# Allegro board SOLAR_v1.brd
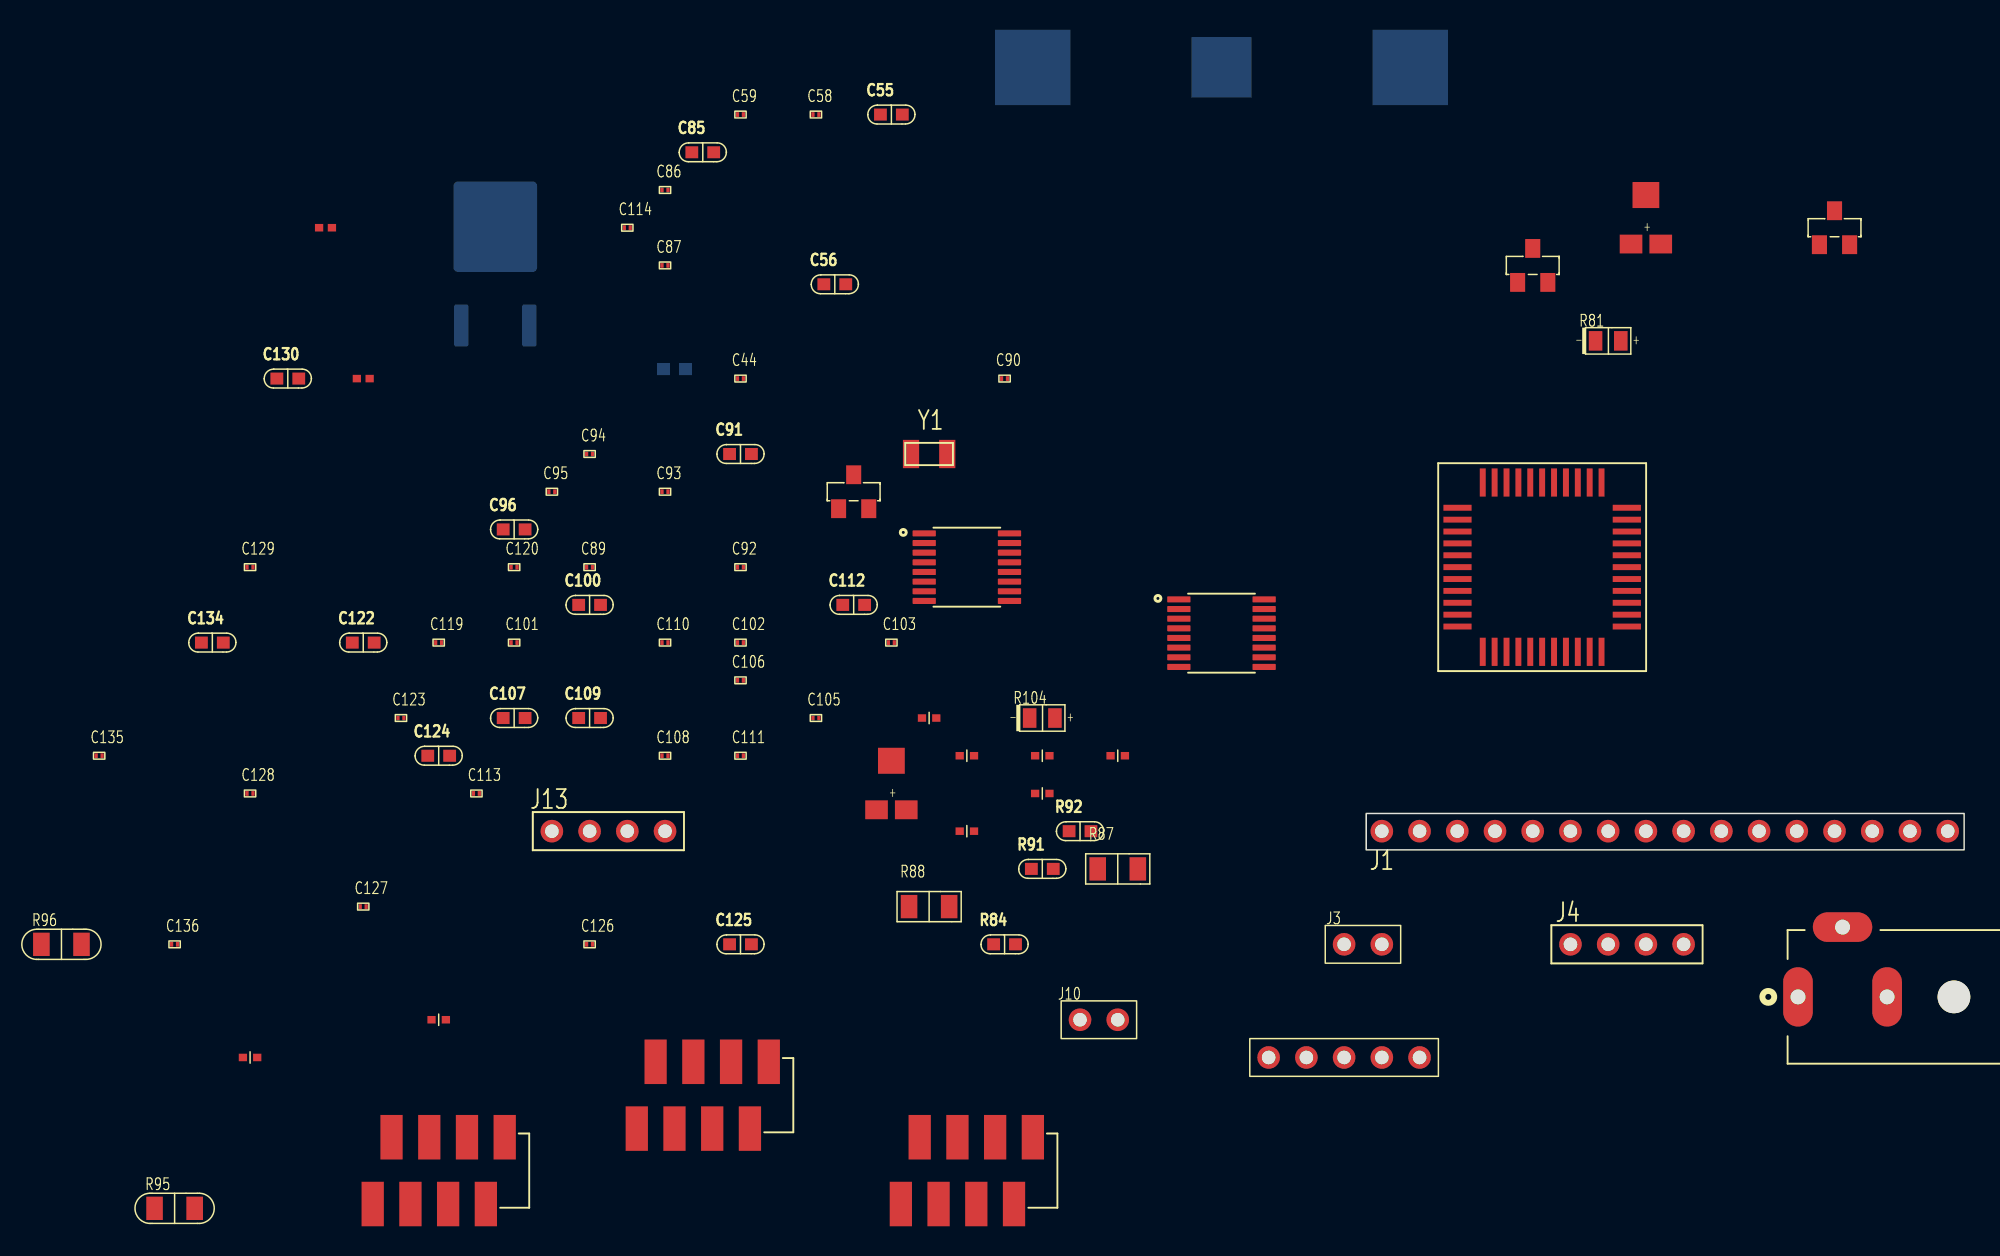
[diagram p0: board, top side]
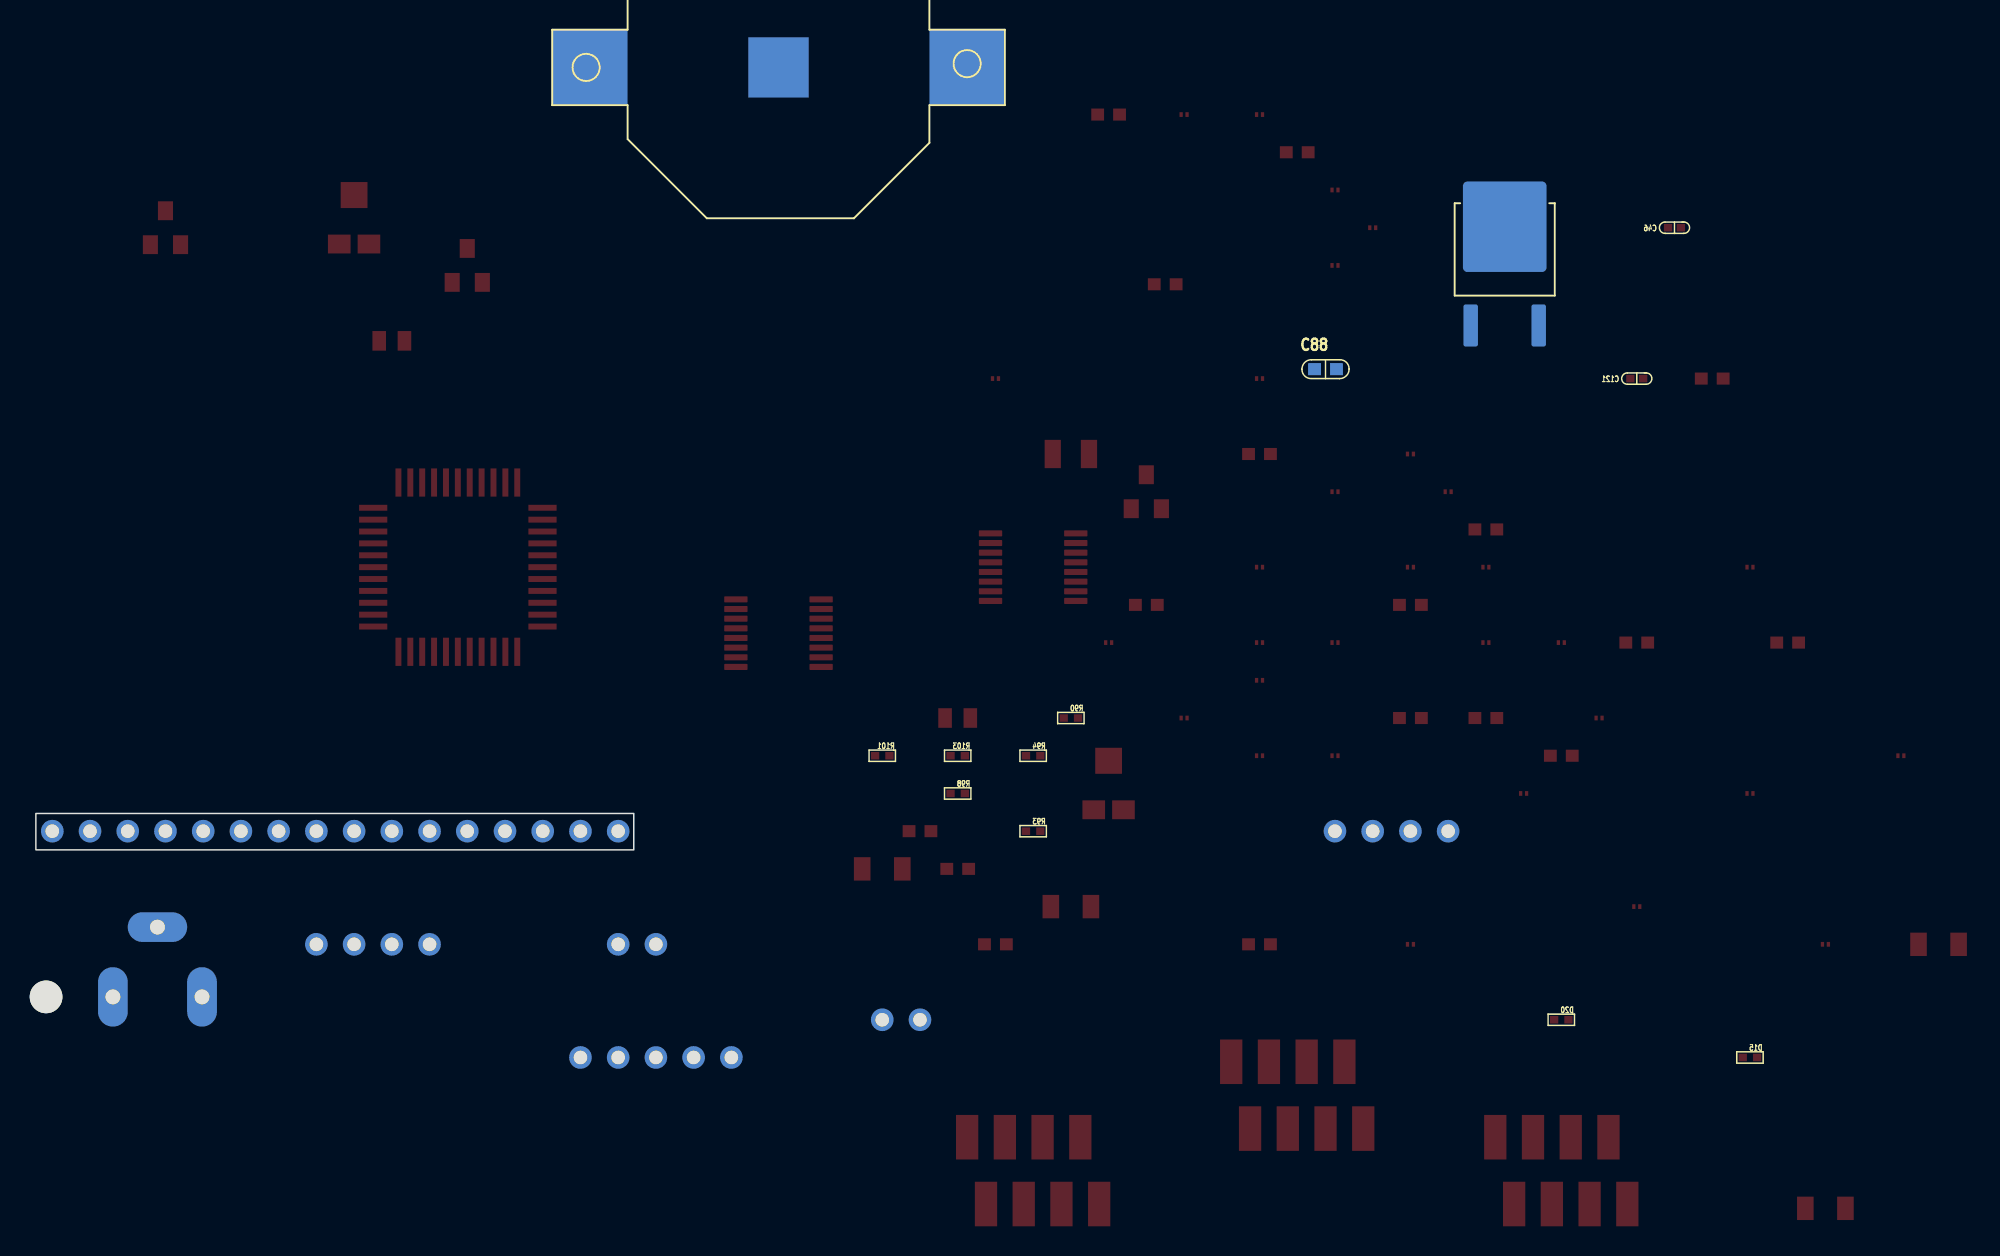
[diagram p1: board, bottom side, seen from below]

Outline 40.25 x 2.45 mm; copper layers: TOP, BOTTOM. Coordinates in mm from the lower left corner of the outline.

## Design rules (mm)
constraint set DEFAULT: min track width 0.127

## Placement (name value [footprint] x y rotation side)
C44  0.1u  [0201]  -42.13 31.74 0 top
C46  0.22u  [0402C_B]  -70.07 41.9 0 top
C55  10u  [0603G_B]  -31.97 49.52 0 top
C56  4.7u  [0603G_B]  -35.78 38.09 0 top
C58  1u  [0201]  -37.05 49.52 0 top
C59  0.1u  [0201]  -42.13 49.52 0 top
C85  10u  [0603G_B]  -44.67 46.98 0 top
C86  1u  [0201]  -47.21 44.44 0 top
C87  0.1u  [0201]  -47.21 39.36 0 top
C88  10u  [0603G_B]  -46.57 32.37 180 bottom
C89  1u  [0201]  -52.29 19.04 0 top
C90  0.1u  [0201]  -24.35 31.74 0 top
C91  10u  [0603G_B]  -42.13 26.66 0 top
C92  1u  [0201]  -42.13 19.04 0 top
C93  0.1u  [0201]  -47.21 24.12 0 top
C94  1u  [0201]  -52.29 26.66 0 top
C95  0.1u  [0201]  -54.83 24.12 0 top
C96  10u  [0603G_B]  -57.37 21.58 0 top
C100  10u  [0603G_B]  -52.29 16.5 0 top
C101  1u  [0201]  -57.37 13.96 0 top
C102  0.1u  [0201]  -42.13 13.96 0 top
C103  0.1u  [0201]  -31.97 13.96 0 top
C105  1u  [0201]  -37.05 8.88 0 top
C106  0.1u  [0201]  -42.13 11.42 0 top
C107  10u  [0603G_B]  -57.37 8.88 0 top
C108  0.1u  [0201]  -47.21 6.34 0 top
C109  10u  [0603G_B]  -52.29 8.88 0 top
C110  1u  [0201]  -47.21 13.96 0 top
C111  0.1u  [0201]  -42.13 6.34 0 top
C112  10u  [0603G_B]  -34.51 16.5 0 top
C113  1u  [0201]  -59.91 3.8 0 top
C114  0.1u  [0201]  -49.75 41.9 0 top
C119  0.1u  [0201]  -62.45 13.96 0 top
C120  0.1u  [0201]  -57.37 19.04 0 top
C121  0.22u  [0402C_B]  -67.53 31.74 0 top
C122  10u  [0603G_B]  -67.53 13.96 0 top
C123  1u  [0201]  -64.99 8.88 0 top
C124  10u  [0603G_B]  -62.45 6.34 0 top
C125  10u  [0603G_B]  -42.13 -6.36 0 top
C126  1u  [0201]  -52.29 -6.36 0 top
C127  0.1u  [0201]  -67.53 -3.82 0 top
C128  1u  [0201]  -75.15 3.8 0 top
C129  0.1u  [0201]  -75.15 19.04 0 top
C130  10u  [0603G_B]  -72.61 31.74 0 top
C134  10u  [0603G_B]  -77.69 13.96 0 top
C135  1u  [0201]  -85.31 6.34 0 top
C136  0.1u  [0201]  -80.23 -6.36 0 top
D15  CDBQC0130L-HF  [0402R_B]  -75.15 -13.98 0 top
D20  CDBQC0130L-HF  [0402R_B]  -62.45 -11.44 0 top
H1  Coin Cell Bat Holder  [CR2032-SMD]  -9.74 52.69 180 bottom
J1  LCD Conn  [JUMPER16X1]  1.05 1.26 0 top
J2  KEYPAD CONN  [HEADER_8_SMT_254MM]  -44.67 -16.52 0 top
J3  MagSensor CONN  [JUMPER2]  -1.49 -6.36 0 top
J4  STEPPER MOTOR CONN  [JUMPER4]  13.75 -6.36 0 top
J6  CON2  [DC_JACK]  34.07 -8.9 0 top
J8  HEADER 8  [HEADER_8_SMT_254MM]  -26.89 -21.6 0 top
J9  HEADER 5  [JUMPER5]  -6.57 -13.98 0 top
J10  Fan Conn  [JUMPER2]  -19.27 -11.44 0 top
J12  HEADER 8  [HEADER_8_SMT_254MM]  -62.45 -21.6 0 top
J13  HEADER 4  [JUMPER4]  -54.83 1.26 0 top
Q1  MOSFET N  [SOT23-3A]  -34.51 24.12 0 top
Q4  MOSFET P  [SOT23-3A]  11.21 39.36 0 top
Q5  MOSFET N  [SOT23-3A]  31.53 41.9 0 top
R80  858-35WR1KLFTR  [VARR]  18.83 41.9 0 top
R81  2.1K  [0805D]  16.29 34.28 0 top
R84  0  [0603G_B]  -24.35 -6.36 0 top
R87  50mOhm  [1206R]  -16.73 -1.28 0 top
R88  50mOhm  [1206R]  -29.43 -3.82 0 top
R89  858-35WR20KLFTR  [VARR]  -31.97 3.8 0 top
R90  0  [0402R_B]  -29.43 8.88 0 top
R91  0  [0603G_B]  -21.81 -1.28 0 top
R92  0  [0603G_B]  -19.27 1.26 0 top
R93  10k  [0402R_B]  -26.89 1.26 0 top
R94  20k  [0402R_B]  -26.89 6.34 0 top
R95  100k  [1206C]  -80.23 -24.14 0 top
R96  100k  [1206C]  -87.85 -6.36 0 top
R98  10k  [0402R_B]  -21.81 3.8 0 top
R101  0  [0402R_B]  -16.73 6.34 0 top
R103  10k  [0402R_B]  -21.81 6.34 0 top
R104  100ohm  [0805D]  -21.81 8.88 0 top
U19  STC15_LQFP44  [LQFP-44]  11.85 19.04 0 top
U20  NCP5501UG  [DPAK229P990X238-3N]  -58.64 37.45 180 bottom
U23  SN74LV4051A-Q1  [SOP65P640X120-16N]  -26.89 19.04 0 top
U24  SN74LV4051A-Q1  [SOP65P640X120-16N]  -9.74 14.59 0 top
Y1  32.768kHz  [XTAL320X150X90]  -29.43 26.66 0 top

## Library data of the parts
C44 = CAP NP
C46 C121 = CAPACITOR
C55 C56 C58 C59 C85-C96 C100-C103 C105-C114 C119 C120 C122-C130 C134-C136 = CAP
D15 D20 = DIODE
H1 = Coin Cell Bat Holder
J1 = HEADER 16
J2 J8 J12 = HEADER 8
J3 = HEADER 2
J4 J13 = HEADER 4
J6 = CON2_1
J9 = HEADER 5
J10 = CON2
Q1 Q5 = MOSFET N_1
Q4 = MOSFET P_1
R80 R89 = RESISTOR VAR
R81 R104 = RESISTOR
R84 R87 R88 R90-R96 R98 R101 R103 = R
U19 = STC15
U20 = NCP5501UG
U23 U24 = SN74LV4051A-Q1
Y1 = CRYSTAL

## Footprints (pads in the part's own frame, mm; a bottom-side part is the same pattern mirrored in y, then rotated)
0201
  rect 0.22x0.32 smd: 1(-0.203,0) 2(0.197,0)
0402C_B
  rect 0.559x0.508 smd: 1(-0.432,0) 2(0.432,0)
0402R_B
  rect 0.559x0.508 smd: 1(-0.483,0) 2(0.483,0)
0603G_B
  rect 0.864x0.813 smd: 1(-0.737,0) 2(0.737,0)
0805D
  rect 0.914x1.321 smd: 1(0.85,0) 2(-0.85,0)
1206C
  rect 1.118x1.575 smd: 1(-1.35,0) 2(1.35,0)
1206R
  rect 1.118x1.575 smd: 1(-1.35,0) 2(1.35,0)
CR2032-SMD
  rect 5.08x5.08 smd: 1(-12.7,0) 2(12.7,0)
  rect 4.064x4.064 smd: 3(0,0)
DC_JACK
  round 2.2 hole 2.2 unplated: (5.5,-1)
  oval 2x4 hole 1: 1(-5,-1) 2(1,-1)
  oval 4x2 hole 1: 3(-2,3.7)
DPAK229P990X238-3N
  custom 0.97x2.83 smd: 1(-2.29,-2.14) 3(2.29,-2.14)
  custom 5.63x6.09 smd: 4(0,4.51)
HEADER_8_SMT_254MM
  rect 1.5x3 smd: 1(-4.445,-2.25) 2(-3.175,2.25) 3(-1.905,-2.25) 4(-0.635,2.25) 5(0.635,-2.25) 6(1.905,2.25) 7(3.175,-2.25) 8(4.445,2.25)
JUMPER2
  round 1.524 hole 0.914: 1(0,0) 2(2.54,0)
JUMPER4
  round 1.524 hole 0.914: 1(0,0) 2(2.54,0) 3(5.08,0) 4(7.62,0)
JUMPER5
  round 1.524 hole 0.914: 1(0,0) 2(2.54,0) 3(5.08,0) 4(7.62,0) 5(10.16,0)
JUMPER16X1
  round 1.524 hole 0.914: 1(0,0) 2(2.54,0) 3(5.08,0) 4(7.62,0) 5(10.16,0) 6(12.7,0) 7(15.24,0) 8(17.78,0) 9(20.32,0) 10(22.86,0) 11(25.4,0) 12(27.94,0) 13(30.48,0) 14(33.02,0) 15(35.56,0) 16(38.1,0)
LQFP-44
  rect 1.9x0.4 smd: 1(-5.7,4) 2(-5.7,3.2) 3(-5.7,2.4) 4(-5.7,1.6) 5(-5.7,0.8) 6(-5.7,0) 7(-5.7,-0.8) 8(-5.7,-1.6) 9(-5.7,-2.4) 10(-5.7,-3.2) 11(-5.7,-4) 23(5.7,-4) 24(5.7,-3.2) 25(5.7,-2.4) 26(5.7,-1.6) 27(5.7,-0.8) 28(5.7,0) 29(5.7,0.8) 30(5.7,1.6) 31(5.7,2.4) 32(5.7,3.2) 33(5.7,4)
  rect 0.4x1.9 smd: 12(-4,-5.7) 13(-3.2,-5.7) 14(-2.4,-5.7) 15(-1.6,-5.7) 16(-0.8,-5.7) 17(0,-5.7) 18(0.8,-5.7) 19(1.6,-5.7) 20(2.4,-5.7) 21(3.2,-5.7) 22(4,-5.7) 34(4,5.7) 35(3.2,5.7) 36(2.4,5.7) 37(1.6,5.7) 38(0.8,5.7) 39(0,5.7) 40(-0.8,5.7) 41(-1.6,5.7) 42(-2.4,5.7) 43(-3.2,5.7) 44(-4,5.7)
SOP65P640X120-16N
  custom 1.57x0.41 smd: 1(-2.87,2.275) 2(-2.87,1.625) 3(-2.87,0.975) 4(-2.87,0.325) 5(-2.87,-0.325) 6(-2.87,-0.975) 7(-2.87,-1.625) 8(-2.87,-2.275) 9(2.87,-2.275) 10(2.87,-1.625) 11(2.87,-0.975) 12(2.87,-0.325) 13(2.87,0.325) 14(2.87,0.975) 15(2.87,1.625) 16(2.87,2.275)
SOT23-3A
  rect 1.016x1.27 smd: 1(-1.016,-1.143) 2(1.016,-1.143) 3(0,1.143)
VARR
  rect 1.524x1.27 smd: 1(-1,-1.1) 2(1,-1.1)
  rect 1.803x1.753 smd: 3(0,2.2)
XTAL320X150X90
  rect 1.092x1.905 smd: 1(-1.219,0) 2(1.219,0)

## Nets
GND: C44.2 C124.2 C125.2 C126.2 C127.2 C134.2 C135.2 C136.2 H1.3 J1.3 R101.1
VBAT: H1.1 H1.2(P1) Q4.2(SOURCE)
VBAT_MOSFET_D: D20.1 Q4.3
VCC: C44.1 C56.1 C85.1 C86.1 C87.1 C88.1 C89.1 C90.1 C91.1 C92.1 C93.1 C94.1 C95.1 C96.1 C100.1 C101.1 C102.1 C103.1 C105.1 C106.1 C109.1 C110.1 C111.1 C112.1 C113.1 C114.1 C121.1 C128.1 C129.1 C130.1 D15.1 J1.4 J3.1 J13.4 Q4.1 R80.3 R90.2 R94.1 R95.2 R98.1 U19.14 U23.16 U24.16
VDD_RTC: C134.1 C135.1 C136.1 D15.2(CATHODE) D20.2(CATHODE)
0: C46.2 C55.2 C56.2 C58.2 C59.2 C85.2 C86.2 C87.2 C88.2 C89.2 C90.2 C91.2 C92.2 C93.2 C94.2 C95.2 C96.2 C100.2 C101.2 C102.2 C103.2 C105.2 C106.2 C107.2 C108.2 C109.2 C110.2 C111.2 C112.2 C113.2 C114.2 C121.2 C122.2 C123.2 C128.2 C129.2 C130.2 J6.1 J6.2 J13.3 Q1.2(SOURCE) R80.1 R81.2 R84.2 R87.1 R88.1 R89.1 R91.2 R92.2 R93.2 R96.2 R103.1 R104.2 U19.16 U20.4 U23.6 U23.7 U23.8 U24.6 U24.7 U24.8
A4988_ENABLE: R96.1
A4988_REF: Q5.3 R89.2(WIPER)
ADC0: U19.4 U24.3
ADC0_A: U19.34 U24.11
ADC0_B: U19.35 U24.10
ADC0_C: U19.36 U24.9
ADC0_I0: J8.1 U24.13
ADC0_I1: J8.2 U24.14
ADC0_I2: J8.3 U24.15
ADC0_I3: J8.4 U24.12
ADC0_I4: J8.5 U24.1
ADC0_I5: J8.6 U24.5
ADC0_I6: J8.7 U24.2
ADC0_I7: J8.8 U24.4(Y7)
ADC0_I8: J12.1 U23.13
ADC0_I9: J12.2 U23.14
ADC0_I10: J12.3 U23.15
ADC0_I11: J12.4 U23.12
ADC0_I12: J12.5 U23.1
ADC0_I13: J12.6 U23.5
ADC0_I14: J12.7 U23.2
ADC0_I15: J12.8 U23.4(Y7)
ADC1: U19.5 U23.3
ADC1_A: U19.37 U23.11
ADC1_B: U19.38 U23.10
ADC1_C: U19.39 U23.9
ADC2: J9.1 U19.7
ADC3: J9.2 U19.8
ADC4: J9.3 U19.9
ADC5: J9.4 U19.10
ADC6: J9.5 U19.11(XTAL2/RXD_3/ADC6/P1.6)
CP1: C120.1
CP2: C120.2
FAN+V: J10.2 Q1.3
KP1: J2.1 U19.40
KP2: J2.2 U19.41
KP3: J2.3 U19.42
KP4: J2.4 U19.43
KP5: J2.5 U19.44
KP6: J2.6 U19.1
KP7: J2.7 U19.2
KP8: J2.8 U19.3
LCD_CONTRAST: J1.5 R80.2(WIPER)
LCD_D5: J1.13 U19.22
LCD_D6: J1.14 U19.23
LCD_D7: J1.15 U19.24
LCD_D8: J1.16 U19.25
LCD_EN: J1.8 U19.21
LCD_RS: J1.6 U19.17
LCD_RW: J1.7 U19.20
MS1: R84.1
MS2: R91.1
MS3: R92.1
MTOR_CURRENT_CTRL: Q5.1 U19.13
OUT1A: J4.3
OUT1B: J4.1
OUT2A: J4.4
OUT2B: J4.2
P5.5_FANCTRL: Q1.1 R98.2 U19.15
P41_STEP: U19.26
P42_DIR: U19.27
P43_MOTORSLEEP: R95.1 U19.28
P44_MAGSENSOR: J3.2 R81.1 U19.29
PCF85063BTL_CE: U19.30
PCF85063BTL_SCL: U19.32
PCF85063BTL_SDIO: U19.31
ROSC: R93.1
RTC_XTAL1: Y1.2
RTC_XTAL2: Y1.1
SENSE1: R88.2
SENSE2: R87.2
STC_RXD: J13.1 U19.18
STC_TXD: J13.2 U19.19
TEMPERATURE: R104.1 U19.12
V_5V_BEFORE_R: R90.1 U20.3(VOUT)
VARR_REF+: R89.3 R94.2
VCP: C119.2
VMAIN_9V: C55.1 C58.1 C59.1 C107.1 C108.1 C119.1 C122.1 C123.1 C124.1 C125.1 C126.1 C127.1 J6.3 J10.1 U20.1
VREG: C46.1
N5250479: R101.2
N5256154: Q5.2(SOURCE) R103.2

Pads without a net: J1 1 2 9 10 11 12; U19 6 33
